# Altium PCB myjtag.PcbDoc
Units mm, origin at the board's own origin, x right, y up, seen from the top; angles counter-clockwise.
Board outline 46.25 x 32.25 mm, 2 copper layers (Top Layer, Bottom Layer), stack 1.3 mm thick; 35 components, 36 nets, 200 pads, 49 vias.
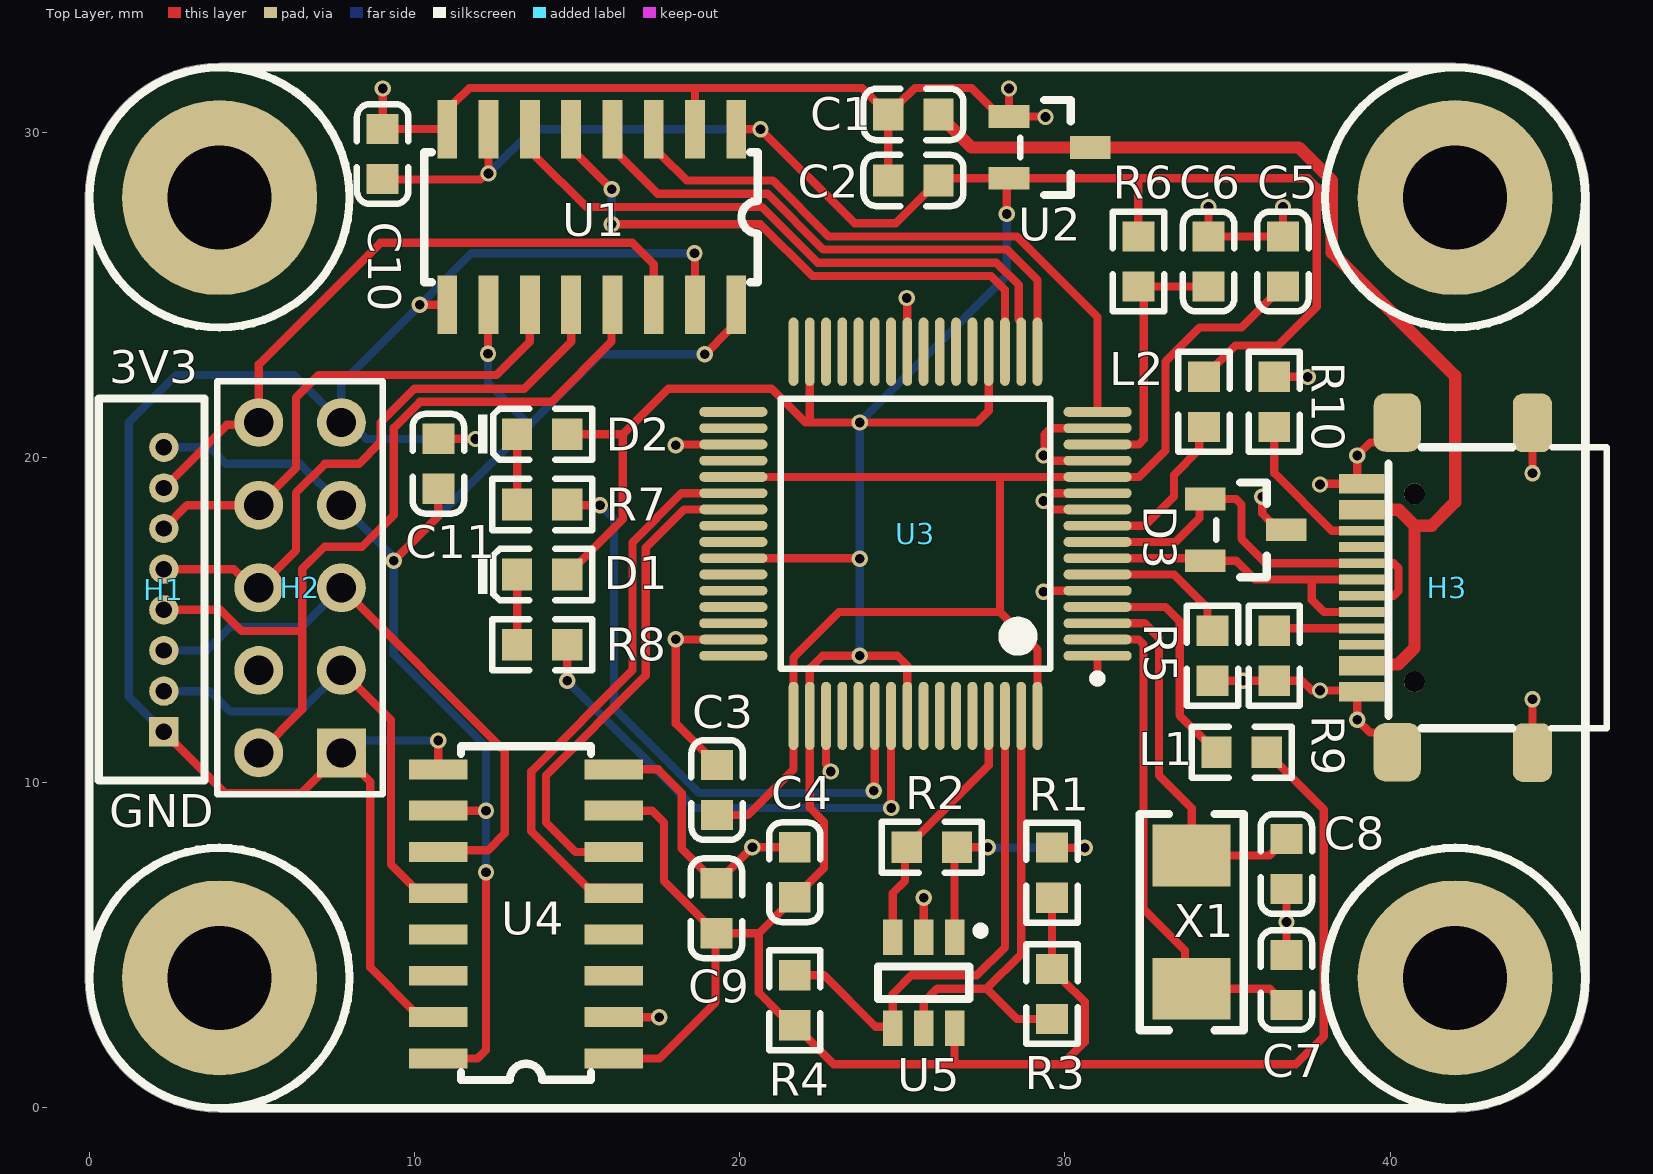
[diagram p0: Top Layer view]
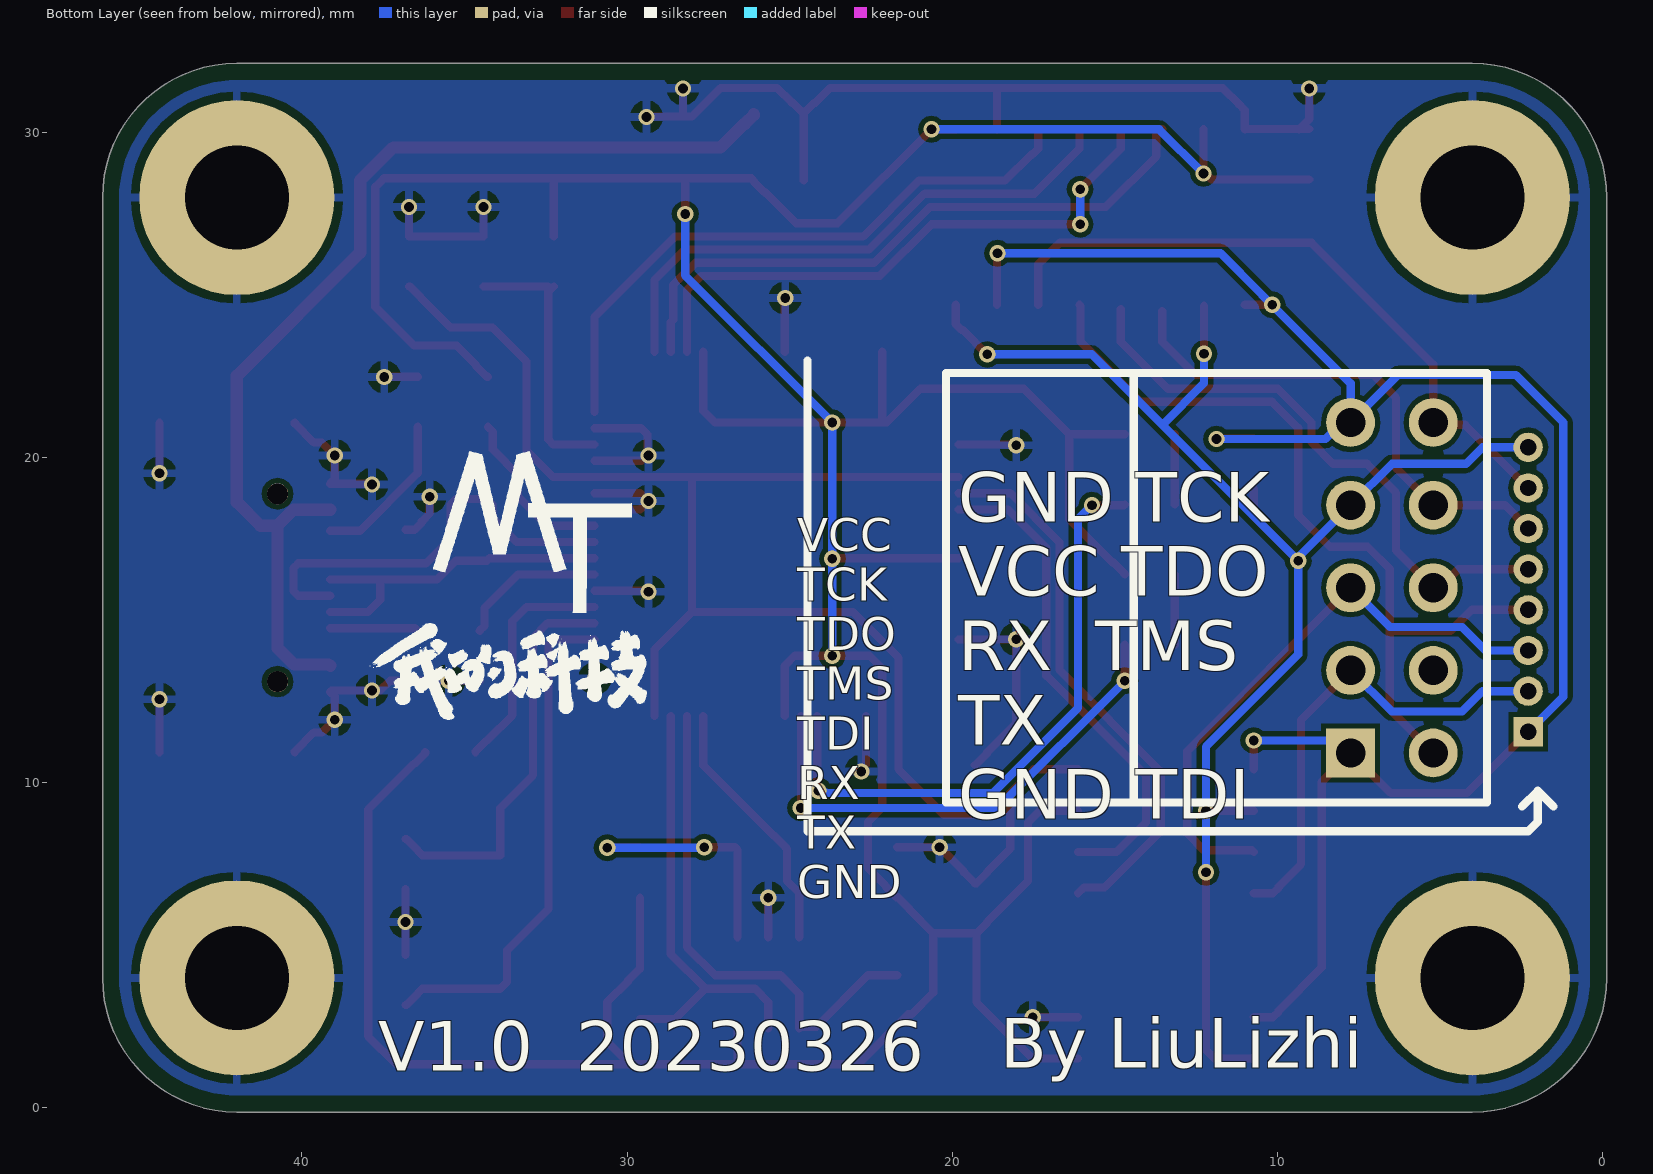
[diagram p1: Bottom Layer view, seen from below]
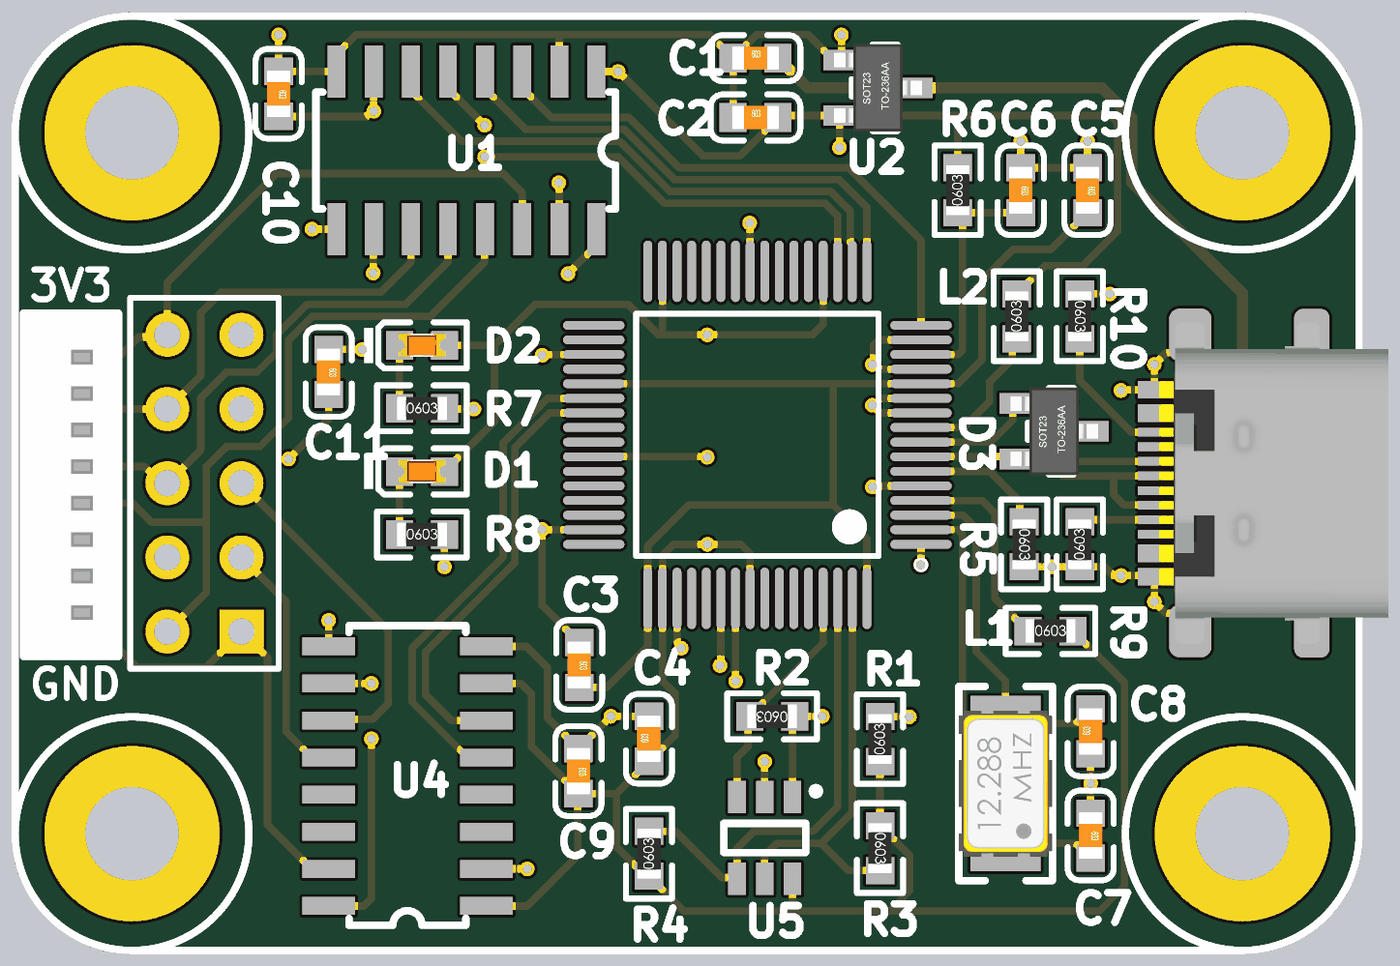
[diagram p2: 3D render of the assembled board from above, using the file's embedded part models]

## Layer stack, top to bottom
Top Solder: solder mask 0.15, Solder Resist, Dk 3.5
Top Layer: signal copper 0.35
Dielectric 1: dielectric 0.6, FR-4, Dk 4.8
Bottom Layer: signal copper 0.35
Bottom Solder: solder mask 0.15, Solder Resist, Dk 3.5

## Board outline
4,-0.127 cw(c4,4) -0.127,4 cw(c4,4) -0.127,4.005 -0.127,28 cw(c4,28) 4,32.127 cw(c4.002,31.096) 4.005,32.127 42,32.127 cw(c42,28) 46.127,28 cw(c42,28) 46.127,27.995 46.127,4 ccw(c45.312,4.002) 46.127,4.005 46.127,4 cw(c42,4) 42,-0.127 cw(c42,4) 41.995,-0.127

## Design rules (kind name [scope] priority, off if disabled: settings)
BoardOutlineClearance [All] p1: gap=0.508 ignorepadtopadclearanceinfootprint=FALSE
Clearance Clearance_1 [inpolygon vs OnLayer('Keep-Out Layer')] p1: gap=1.27 ignorepadtopadclearanceinfootprint=FALSE
Clearance [All] p2: gap=0.152 ignorepadtopadclearanceinfootprint=FALSE
DiffPairsRouting DiffPair_DiffPairsRouting [All] p1: maxlimit=0.254 minlimit=0.254 mostfreqgap=0.254 toplayer_minwidth=0.152 toplayer_maxwidth=0.381 toplayer_prefwidth=0.254 bottomlayer_minwidth=0.152 bottomlayer_maxwidth=0.381 bottomlayer_prefwidth=0.254 maxuncoupledlength=12.7
DiffPairsRouting DiffPairsRouting_1 [InDifferentialPair ('D')] p2: maxlimit=0.254 minlimit=0.254 mostfreqgap=0.254 toplayer_minwidth=0.381 toplayer_maxwidth=0.381 toplayer_prefwidth=0.381 bottomlayer_minwidth=0.381 bottomlayer_maxwidth=0.381 bottomlayer_prefwidth=0.381 maxuncoupledlength=12.7
DiffPairsRouting D_DiffPairsRouting [InDifferentialPair ('D')] p3: maxlimit=0.254 minlimit=0.254 mostfreqgap=0.254 toplayer_minwidth=0.381 toplayer_maxwidth=0.381 toplayer_prefwidth=0.381 bottomlayer_minwidth=0.381 bottomlayer_maxwidth=0.381 bottomlayer_prefwidth=0.381 maxuncoupledlength=12.7
DiffPairsRouting [All] p4: maxlimit=0.254 minlimit=0.152 mostfreqgap=0.254 toplayer_minwidth=0.152 toplayer_maxwidth=0.381 toplayer_prefwidth=0.254 bottomlayer_minwidth=0.152 bottomlayer_maxwidth=0.381 bottomlayer_prefwidth=0.254 maxuncoupledlength=12.7
HoleSize [All] p1: absolutevalues=TRUE maxlimit=3.81 minlimit=0.025 maxpercent=80.000 minpercent=20.000
MatchedLengths DiffPair_MatchedLengths [InDifferentialPair ('USB')] p1: tolerance=25.4 checknetsindiffpair=FALSE checkdiffpairvsdiffpair=TRUE checkxsignals=TRUE checkothers=TRUE
MatchedLengths [InDifferentialPair ('D')] p2: tolerance=25.4 checknetsindiffpair=FALSE checkdiffpairvsdiffpair=TRUE checkxsignals=TRUE checkothers=TRUE
MatchedLengths D_MatchedLengths [InDifferentialPair ('D')] p3: tolerance=25.4 checknetsindiffpair=FALSE checkdiffpairvsdiffpair=TRUE checkxsignals=TRUE checkothers=TRUE
PolygonConnect [All] p1: connectstyle=Relief reliefconductorwidth=0.254 reliefentries=4 polygonreliefangle="90 Angle" airgapwidth=0.254
RoutingVias [All] p1: holewidth=0.3 width=0.5 viastyle="Through Hole" minholewidth=0.3 minwidth=0.45 maxholewidth=3.81 maxwidth=4.318
SilkToSilkClearance [All] p1 off: silktosilkclearance=0.254
SilkToSolderMaskClearance [IsPad] p1 off: minsilkscreentomaskgap=0.254 clearancetoexposedcopper=TRUE
SolderMaskExpansion [All] p1: expansion=0.102 istentingtop=FALSE
UnRoutedNet [All] p1: checkbadconnections=TRUE
Width [All] p1: maxlimit=0.508 minlimit=0.152 preferedwidth=0.152
25 further rules are at their usual default settings.

## Components (designator, comment, footprint, x,y, rotation, side; value= is the part's Value field where it differs from the comment)
C1 "10UF" 0603_C 25.339,30.556 r0 top
C2 "10UF" 0603_C 25.339,28.524 r0 top
C3 "104" 0603_C 19.304,9.779 r270 top
C4 "104" 0603_C 21.691,7.25 r90 top
C5 "10UF" 0603_C 36.703,26.035 r270 top
C6 "10NF" 0603_C 34.417,26.035 r270 top
C7 "22PF" 0603_C 36.81,3.937 r270 top
C8 "22PF" 0603_C 36.81,7.501 r90 top
C9 "104" 0603_C 19.279,6.142 r270 top
C10 "104" 0603_C 9.017,29.337 r270 top
C11 "104" 0603_C 10.729,19.812 r270 top
D1 "0603_LED" 0603_LED 13.922,16.404 r0 top
D2 "0603_LED" 0603_LED 13.922,20.722 r0 top
D3 "ESD5302" SOT23 35.56,17.78 r0 top
H1 "SH1.25mm_8P" SH1.25MM_8P 2.286,20.32 r270 top locked
H2 "Header_2.54_5P_2" HDR2_5P 7.747,10.92 r180 top locked
H3 "USB_C" USB_C_16PIN_SMT 39.7,16 r90 top locked
L1 "600R1A" 0603_R 35.433,10.94 r0 top
L2 "600R1A" 0603_R 34.279,21.717 r90 top
R1 "10K" 0603_R 29.599,7.239 r90 top
R2 "2K" 0603_R 25.908,8.02 r180 top
R3 "10K" 0603_R 29.599,3.505 r270 top
R4 "10K" 0603_R 21.691,3.313 r90 top
R5 "12K" 0603_R 34.533,13.908 r270 top
R6 "10K" 0603_R 32.258,26.035 r90 top
R7 "2K" 0603_R 13.922,18.563 r0 top
R8 "2K" 0603_R 13.922,14.245 r0 top
R9 "5K1" 0603_R 36.438,13.908 r90 top
R10 "5K1" 0603_R 36.438,21.717 r270 top
U1 "CA-IS3741" SOIC16N 19.893,30.099 r270 top
U2 "3.3V" SOT23 29.53,29.54 r0 top
U3 "FT2232H" LQFP64 25.403,17.658 r180 top
U4 "CA-IS3741" SOIC16N 16.129,1.524 r180 top
U5 "93LC56BT" SOT_23_6 25.654,3.854 r270 top
X1 "12MHz" XTAL_5032 33.898,5.718 r90 top

## Footprints (in the part's own frame and the unit in brackets; to place one, negate y for a bottom-side part, rotate by r counter-clockwise, add the part's x,y. Pads: shape width x height; smd on the part's side, far side on the other; paste and mask are expansions set on the pad)
0603_C [mm]
  rect 0.93x0.98 smd: 1(-0.77,0) 2(0.77,0)
  silkscreen extent -1.53,-0.79 1.54,0.79, body extent -0.8,-0.4 0.8,0.4, height 0.3
0603_LED [mm]
  rect 0.93x0.98 smd: A(0.77,0) K(-0.77,0)
  silkscreen extent -1.98,-0.79 1.54,0.79, body extent -0.8,-0.4 0.8,0.4, height 0.6
0603_R [mm]
  rect 0.93x0.98 smd: 1(-0.77,0) 2(0.77,0)
  silkscreen extent -1.53,-0.79 1.54,0.79, body extent -0.85,-0.4 0.85,0.4, height 0.56
HDR2_5P [mm]
  rect 1.5x1.5 hole 0.9: 1(0,0)
  round 1.5 hole 0.9: 2(0,-2.54) 3(0,-5.08) 4(0,-7.62) 5(0,-10.16) 6(2.54,-10.16) 7(2.54,-7.62) 8(2.54,-5.08) 9(2.54,-2.54) 10(2.54,0)
  silkscreen extent -1.27,-11.43 3.81,1.27
LQFP64 [mm]
  oval 2.1x0.3 smd: 1(-5.6,3.75) 2(-5.6,3.25) 3(-5.6,2.75) 4(-5.6,2.25) 5(-5.6,1.75) 6(-5.6,1.25) 7(-5.6,0.75) 8(-5.6,0.25) 9(-5.6,-0.25) 10(-5.6,-0.75) 11(-5.6,-1.25) 12(-5.6,-1.75) 13(-5.6,-2.25) 14(-5.6,-2.75) 15(-5.6,-3.25) 16(-5.6,-3.75) 33(5.6,-3.75) 34(5.6,-3.25) 35(5.6,-2.75) 36(5.6,-2.25) 37(5.6,-1.75) 38(5.6,-1.25) 39(5.6,-0.75) 40(5.6,-0.25) 41(5.6,0.25) 42(5.6,0.75) 43(5.6,1.25) 44(5.6,1.75) 45(5.6,2.25) 46(5.6,2.75) 47(5.6,3.25) 48(5.6,3.75)
  oval 0.3x2.1 smd: 17(-3.75,-5.6) 18(-3.25,-5.6) 19(-2.75,-5.6) 20(-2.25,-5.6) 21(-1.75,-5.6) 22(-1.25,-5.6) 23(-0.75,-5.6) 24(-0.25,-5.6) 25(0.25,-5.6) 26(0.75,-5.6) 27(1.25,-5.6) 28(1.75,-5.6) 29(2.25,-5.6) 30(2.75,-5.6) 31(3.25,-5.6) 32(3.75,-5.6) 49(3.75,5.6) 50(3.25,5.6) 51(2.75,5.6) 52(2.25,5.6) 53(1.75,5.6) 54(1.25,5.6) 55(0.75,5.6) 56(0.25,5.6) 57(-0.25,5.6) 58(-0.75,5.6) 59(-1.25,5.6) 60(-1.75,5.6) 61(-2.25,5.6) 62(-2.75,5.6) 63(-3.25,5.6) 64(-3.75,5.6)
  silkscreen extent -5.72,-4.15 4.15,4.57, body extent -5,-5 5,5, height 1.6
SH1.25MM_8P [mm]
  rect 0.9x0.9 hole 0.5: 1(8.75,0)
  round 0.9 hole 0.5: 2(7.5,0) 3(6.25,0) 4(5,0) 5(3.75,0) 6(2.5,0) 7(1.25,0) 8(0,0)
  silkscreen extent -1.5,-2 10.25,1.25, body extent -1.5,-1.95 10.25,1.25, height 4.7
SOIC16N [mm]
  rect 1.8x0.61 smd: 1(0,0) 2(0,-1.27) 3(0,-2.54) 4(0,-3.81) 5(0,-5.08) 6(0,-6.35) 7(0,-7.62) 8(0,-8.89) 9(5.4,-8.89) 10(5.4,-7.62) 11(5.4,-6.35) 12(5.4,-5.08) 13(5.4,-3.81) 14(5.4,-2.54) 15(5.4,-1.27) 16(5.4,0)
  silkscreen extent 0.7,-9.6 4.7,0.66, body extent 0.7,-9.6 4.7,0.65, height 1.75
SOT23 [mm]
  rect 1.25x0.7 smd: 1(-1.25,0.95) 2(-1.25,-0.95) 3(1.25,0)
  silkscreen extent -0.9,-1.46 0.65,1.46, body extent -1.5,-1.5 1.5,1.5, height 1.3
SOT_23_6 [mm]
  rect 1.1x0.6 smd: 1(-1.4,0.95) 2(-1.4,0) 3(-1.4,-0.95) 4(1.4,-0.95) 5(1.4,0) 6(1.4,0.95)
  silkscreen extent -1.72,-1.4 0.5,1.87, body extent -0.9,-1.45 0.9,1.45, height 1.1
USB_C_16PIN_SMT [mm]
  rrect50% 1.8x1.2 smd: 0(-5.07,-4.677) 0(5.07,-4.677)
  rrect50% 1.8x1.45 smd: 0(-5.06,-0.519) 0(5.08,-0.519)
  rect 0.6x1.4 smd: 1(-3.2,0.57) 2(-2.4,0.57) 11(2.4,0.57) 12(3.2,0.57)
  rect 0.3x1.4 smd: 3(-1.75,0.57) 4(-1.25,0.57) 5(-0.75,0.57) 6(-0.25,0.57) 7(0.25,0.57) 8(0.75,0.57) 9(1.25,0.57) 10(1.75,0.57)
  round 0.65 hole 0.65: 13(-2.888,-1.049) 13(2.888,-1.049)
  silkscreen extent -4.32,-6.96 4.32,-0.25, body extent -5.5,-7.3 5.5,0.55, height 3.2
XTAL_5032 [mm]
  rect 1.9x2.4 smd: 1(-2.05,0) 2(2.05,0)
  silkscreen extent -3.32,-1.6 3.32,1.6, body extent -2.5,-1.6 2.5,1.6, height 1.2

## Part data
C1 C2 C3 C4 C5 C6 C7 C8 C9 C10 C11: library part 0603_CAP
D3: library part PESD5V2S2UT, "ESD DIODE"
H3: library part USB_C_16P_SMT
L1 L2: library part 0603_BeadCore, "Bead core"
R1 R2 R3 R4 R5 R6 R7 R8 R9 R10: library part 0603_RES
U2: library part LDO_XC6206P332MR, "线性稳压器"
X1: library part XTAL_5032, "贴片无源晶振"

## Free pads (board coordinates)
  round 6 hole 3.2: 1(4,4) 1(4,28) 1(42,4) 1(42,28)

## Via types
v1: diameter 0.5, hole 0.3, Top Layer to Bottom Layer, 49 vias

## Nets (pads, with @x,y where several pads share a name; then routed paths per layer and width w, separated by ;. In a path a pad name is that pad's centre, name@x,y a point inside that pad or via, vN(x,y) a via of type N, cw(c..) or ccw(c..) an arc to the next point about the centre after c; other vN are vias at no path point)
1V8: C3.2 C5.2 U3.12 U3.37 U3.49 U3.64 | length 42.1
  Top Layer w0.254: C3.2 20.248,9.009 21.653,10.414 U3.49 21.653,13.849 23.054,15.25 28.005,15.25 ; U3.37 28.005,19.408 ; U3.64 29.153,14.102 28.005,15.25 ; C5.2 36.678,25.265 36.34,24.927 36.34,24.91 35.433,24.003 34.138,24.003 33.091,22.957 33.091,20.217 32.282,19.408 U3.12 28.005,19.408 ; 28.005,15.25 28.005,19.408
3V3: C2.2 C4.1 C9.2 C10.2 D1.A D2.A L1.2 L2.2 R1.1 R3.1 R4.1 R6.2 U1.1 U1.7 U2.2 U3.20 U3.31 U3.42 U3.50 U3.56 U4.1 U4.7 U5.6 | length 150.8
  Top Layer w0.254: C10.2@9.017,28.556 12.024,28.556 12.207,28.739 v1(12.273,28.739) U1.7 ; D1.A 14.692,16.429 15.03,16.767 15.055,16.767 16.401,18.113 16.401,20.698 16.377,20.722 D2.A ; U4.1 17.527,1.524 19.254,3.251 19.254,5.347 C9.2 ; U4.7 17.306,9.144 17.671,8.779 17.671,6.98 18.916,5.735 18.916,5.71 19.254,5.372 C9.2 ; 16.401,20.722 17.803,22.123 20.972,22.123 22.013,21.082 22.153,21.082 ; U3.42 23.669,16.908 v1(23.685,16.891) ; U1.1 20.644,30.099 23.531,27.211 24.797,27.211 25.746,28.161 25.771,28.161 26.109,28.499 C2.2 26.175,28.59 U2.2 ; U3.31 22.153,21.082 ; U3.56 25.153,13.6 24.845,13.908 v1(23.693,13.908) 22.54,13.908 22.153,13.521 U3.50 22.153,9.233 22.587,8.799 22.587,7.376 22.054,6.843 22.054,6.818 21.716,6.48 C4.1 21.666,6.48 21.328,6.142 21.328,6.117 20.583,5.372 ; U5.6 26.604,1.346 ; U3.20 27.653,21.442 27.292,21.082 v1(23.685,21.082) 22.153,21.082 ; v1(28.211,27.495) 28.211,28.521 U2.2 ; R1.1 R3.1 29.624,4.275 29.962,3.937 29.962,3.912 30.607,3.267 30.607,2.032 29.921,1.346 ; R6.2 32.258,28.581 32.249,28.59 ; L2.2 34.304,22.487 34.642,22.825 34.642,22.85 35.241,23.449 36.551,23.449 37.74,24.639 37.74,28.329 37.48,28.59 32.249,28.59 ; L1.2 36.203,10.915 36.541,10.577 36.566,10.577 37.963,9.18 37.963,2.205 37.104,1.346 29.921,1.346 ; C9.2 20.583,5.372 ; 20.583,5.372 20.583,3.547 21.249,2.881 21.353,2.881 R4.1 21.716,2.543 22.054,2.205 22.054,2.18 22.888,1.346 26.604,1.346 ; 26.604,1.346 29.921,1.346 ; U2.2 32.249,28.59
  Bottom Layer w0.254: v1(12.273,28.739) 13.634,30.099 v1(20.637,30.099) ; v1(23.693,13.908) 23.693,16.884 v1(23.685,16.891) v1(23.685,21.082) 28.211,25.608 v1(28.211,27.495)
5V: C1.2 H3.2 H3.11 U2.3 | length 33.4
  Top Layer w0.381: C1.2 26.109,30.531 26.384,30.256 26.409,30.256 27.125,29.54 U2.3 37.194,29.54 38.21,28.524 38.21,26.306 42,22.516 42,18.632 41.28,17.912 40.749,17.912 ; H3.2 39.169,13.639 40.244,13.639 40.749,14.144 40.749,17.912 ; H3.11 40.261,18.4 40.749,17.912
D_N: D3.2 H3.5 H3.7 U3.7 | length 10.7
  Top Layer w0.254: U3.7 34.232,16.908 D3.2 35.265,16.83 35.845,16.25 37.592,16.25 ; H3.5 37.963,15.25 37.592,15.621 37.592,16.25 ; H3.7 37.592,16.25
D_P: D3.1 H3.6 H3.8 U3.8 | length 13.4
  Top Layer w0.254: U3.8 33.398,17.408 34.138,18.148 34.138,18.558 D3.1 35.265,18.73 35.433,18.562 35.433,17.504 36.187,16.75 H3.8 40.112,16.75 40.261,16.601 40.261,15.899 40.112,15.75 H3.6
EECLK: R4.2 U3.62 U5.4 | length 15.9
  Top Layer w0.254: R4.2 22.587,4.083 24.172,2.498 24.66,2.498 U5.4 24.704,3.505 25.282,4.083 27.296,4.083 28.153,4.94 U3.62
EECS: R3.2 U3.63 U5.5 | length 14.1
  Top Layer w0.254: U5.5 25.654,3.251 26.071,3.668 27.594,3.668 ; U3.63 28.653,4.727 27.594,3.668 ; R3.2 28.527,2.735 27.594,3.668
EEDAT: R2.2 U3.61 U5.3 | length 8
  Top Layer w0.254: U5.3 24.704,6.605 25.084,6.985 25.084,7.965 R2.2 ; R2.2@25.138,8.045 25.476,8.383 25.501,8.383 27.653,10.535 U3.61
GND: C1.1 C2.1 C3.1 C4.2 C5.1 C6.1 C7.1 C8.1 C9.1 C10.1 D3.3 H3.0 H3.1 H3.12 pad.1 R5.2 R9.1 R10.1 U1.2 U1.8 U2.1 U3.1 U3.5 U3.10 U3.11 U3.13 U3.15 U3.25 U3.35 U3.47 U3.51 U4.2 U4.8 U5.2 | length 84.4
  Top Layer w0.254: C10.1 U1.8@10.995,30.107 ; v1(9.017,31.351) 9.017,30.414 C10.1@9.335,30.096 ; U1.8 11.003,30.694 11.181,30.872 11.185,30.872 11.682,31.369 18.605,31.369 18.623,31.351 U1.2 ; U4.2 v1(17.526,2.794) ; U4.8 17.488,10.414 18.213,9.689 18.213,7.977 18.916,7.275 18.916,7.25 19.254,6.912 C9.1 19.304,6.912 19.642,7.25 19.642,7.275 v1(20.387,8.02) C4.2 ; 17.653,31.369 23.756,31.369 24.206,30.919 24.231,30.919 C1.1@24.569,30.581 ; v1(18.034,20.383) 18.058,20.408 U3.35 ; C3.1 19.279,10.549 18.941,10.887 18.941,10.912 18.034,11.819 v1(18.034,14.414) 18.041,14.408 U3.47 ; U3.51 22.653,10.561 22.796,10.417 v1(22.796,10.351) ; C2.1 C1.1 C1.1@24.569,30.581 ; v1(25.138,24.91) 25.153,24.895 U3.25 ; U5.2 v1(25.654,6.469) ; v1(28.28,31.351) U2.1 ; v1(29.337,15.875) 29.37,15.908 U3.5 ; v1(29.337,18.669) v1@29.338,18.669 ; v1(29.4,30.48) 29.391,30.49 U2.1 ; v1(30.988,13.208) 31.003,13.223 U3.1 ; U3.10 29.599,18.408 v1@29.338,18.669 ; U3.11 29.599,18.908 29.36,18.669 v1@29.338,18.669 ; U3.13 29.562,19.908 29.404,20.066 v1(29.337,20.066) 29.37,20.099 29.37,20.709 29.569,20.908 U3.15 ; v1(34.417,27.711) C6.1 C5.1 v1(36.703,27.711) ; R5.2 v1(35.485,13.138) R9.1 37.292,13.138 37.592,12.838 v1(37.846,12.838) 39.092,12.838 H3.1 38.989,12.659 v1(38.989,11.938) 39.381,11.546 39.639,11.546 40.219,10.966 H3.0@40.219,10.94 ; v1(36.068,18.796) 36.068,18.288 36.312,18.044 36.312,18.003 36.535,17.78 D3.3 ; R10.1 37.457,22.487 v1(37.465,22.479) ; C7.1 v1(36.81,5.719) C8.1 ; v1(37.846,19.177) 37.869,19.2 H3.12 38.989,19.341 v1(38.989,20.066) 39.389,20.466 39.639,20.466 40.219,21.046 H3.0@40.219,21.08 ; H3.0@44.377,10.93 v1(44.377,12.573) ; v1(44.377,19.522) H3.0@44.377,21.07 ; C1.1@24.569,30.581 24.907,30.919 24.932,30.919 25.382,31.369 27.126,31.369 28.005,30.49 U2.1
GND_O: C11.1 H1.1 H2.1 H2.5 U1.9 U1.15 U4.9 U4.15 | length 60.3
  Top Layer w0.254: H1.1 4.167,9.689 6.516,9.689 H2.1 8.636,10.031 8.636,4.317 9.956,2.997 9.956,2.972 10.134,2.794 U4.15 ; v1(10.16,24.701) 10.162,24.699 U1.9 ; U4.9 v1(10.729,11.303) ; C11.1 11.866,20.582 v1(11.874,20.574) ; v1(18.605,26.289) 18.623,26.271 U1.15
  Bottom Layer w0.254: H1.1 1.206,12.649 1.206,21.082 2.667,22.543 6.285,22.543 H2.5 ; H2.1 8.13,11.303 v1(10.729,11.303) ; v1(10.16,24.701) 10.48,25.022 11.747,26.289 v1(18.605,26.289) ; 10.481,25.02 7.747,22.286 H2.5 ; v1(11.874,20.574) 8.519,20.574 8.013,21.08 H2.5
NetC6_2: C6.2 R6.1 U3.14 | length 8.3
  Top Layer w0.254: U3.14 32.271,20.408 32.42,20.557 32.42,25.103 R6.1 ; R6.1@32.42,25.265 C6.2
NetC7_2: C7.2 U3.2 X1.1 | length 15.8
  Top Layer w0.254: U3.2 32.27,14.408 32.418,14.259 32.418,6.126 33.694,4.85 33.694,3.872 X1.1 36.298,3.668 36.447,3.519 36.447,3.505 36.785,3.167 C7.2
NetC8_2: C8.2 U3.3 X1.2 | length 12.3
  Top Layer w0.254: U3.3 32.44,14.908 32.893,14.455 32.893,10.231 33.898,9.226 X1.2 36.298,7.768 36.447,7.917 36.447,7.933 36.785,8.271 C8.2
NetD1_K: D1.K R8.1 | length 2.2
  Top Layer w0.254: R8.1 D1.K
NetD2_K: D2.K R7.1 | length 2.2
  Top Layer w0.254: R7.1 D2.K
NetH3_4: H3.4 R9.2 | length 2.7
  Top Layer w0.254: R9.2 36.51,14.75 H3.4
NetH3_10: H3.10 R10.2 | length 4.9
  Top Layer w0.254: R10.2 36.438,19.522 38.21,17.75 H3.10
NetL1_1: L1.1 U3.4 | length 7.2
  Top Layer w0.254: U3.4 33.091,15.408 33.528,14.971 33.528,12.075 34.3,11.303 34.325,11.303 34.663,10.965 L1.1
NetL2_1: L2.1 U3.9 | length 5.2
  Top Layer w0.254: U3.9 32.459,17.908 33.351,18.799 33.351,19.472 34.129,20.25 34.129,20.797 L2.1
NetR1_2: R1.2 R2.1 U5.1 | length 7.7
  Top Layer w0.254: U5.1 26.604,7.946 R2.1 v1(27.623,8.02) ; R1.2 29.607,8.001 v1(30.607,8.001)
  Bottom Layer w0.254: v1(27.623,8.02) 27.642,8.001 v1(30.607,8.001)
NetR5_1: R5.1 U3.6 | length 4.6
  Top Layer w0.254: U3.6 33.351,16.408 34.383,15.375 34.383,14.827 R5.1
NetR7_2: R7.2 U3.54 | length 18.8
  Top Layer w0.254: R7.2 14.715,18.54 v1(15.701,18.54) ; v1(24.123,9.756) 24.153,9.785 U3.54
  Bottom Layer w0.254: v1(15.701,18.54) 16.129,18.112 16.129,12.308 18.748,9.689 23.883,9.689 23.902,9.709 24.076,9.709 v1(24.123,9.756)
NetR8_2: R8.2 U3.55 | length 15.5
  Top Layer w0.254: v1(14.692,13.138) R8.2 ; U3.55 24.653,9.233 v1(24.66,9.226)
  Bottom Layer w0.254: v1(14.692,13.138) 18.604,9.226 v1(24.66,9.226)
RX: U3.39 U4.6 | length 15.4
  Top Layer w0.254: U4.6 14.944,7.874 14.039,8.779 14.039,10.229 17.107,13.297 17.107,17.227 18.288,18.408 U3.39
RX_O: H1.3 H2.3 U4.11 | length 18.2
  Top Layer w0.254: H2.3 12.769,10.978 12.769,8.439 12.254,7.924 10.779,7.924 U4.11
  Bottom Layer w0.254: H1.3 3.592,14.07 4.317,14.795 6.542,14.795 H2.3
TCK: U1.3 U3.16 | length 19.3
  Top Layer w0.254: U1.3 17.353,29.504 17.531,29.326 17.567,29.326 18.369,28.524 21.016,28.524 22.735,26.805 28.524,26.805 31.003,24.326 U3.16
TCK_O: H1.7 H2.6 U1.14 | length 20.8
  Top Layer w0.254: H1.7 4.225,21.009 5.136,21.009 H2.6 5.207,22.87 8.944,26.607 16.696,26.607 17.353,25.949 U1.14
TDI: U1.4 U3.17 | length 17.5
  Top Layer w0.254: U1.4 16.083,29.504 17.47,28.117 20.847,28.117 22.566,26.399 28.211,26.399 29.153,25.457 U3.17
TDI_O: H1.4 H2.10 U1.13 | length 25.9
  Top Layer w0.254: H1.4 4.023,15.32 4.675,14.668 6.54,14.668 ; H2.10 6.54,12.254 6.54,14.668 ; U1.13 16.058,24.673 16.058,23.567 14.208,21.717 10.16,21.717 9.36,20.917 9.36,18.238 8.382,17.26 7.227,17.26 6.54,16.573 6.54,14.668
TDO: U1.6 U3.18 | length 19.5
  Top Layer w0.254: U1.6 13.721,29.921 13.721,29.268 15.278,27.711 20.679,27.711 22.398,25.992 27.898,25.992 28.582,25.308 28.582,24.241 28.653,24.17 U3.18
TDO_O: H1.6 H2.7 U1.11 | length 15.8
  Top Layer w0.254: H1.6 3.006,18.54 H2.7 6.35,19.683 6.35,21.844 7.048,22.543 12.517,22.543 13.541,23.567 13.541,24.508 U1.11@13.543,24.51
TMS: U1.5 U3.19 | length 18.3
  Top Layer w0.254: U1.5 14.813,29.504 16.06,28.258 v1(16.066,28.258) ; v1(16.066,27.178) 20.638,27.178 22.23,25.586 27.729,25.586 28.153,25.162 U3.19
  Bottom Layer w0.254: v1(16.066,27.178) v1(16.066,28.258)
TMS_O: H1.5 H2.8 U1.12 | length 18.3
  Top Layer w0.254: H1.5 4.435,16.57 5.005,16 H2.8 6.35,17.143 6.35,18.923 7.239,19.812 8.286,19.812 8.954,20.479 8.954,21.085 9.992,22.123 13.375,22.123 14.813,23.562 U1.12@14.813,24.564
TX: U3.38 U4.5 | length 17.2
  Top Layer w0.254: U4.5 15.951,6.782 15.316,6.782 13.589,8.509 13.589,10.354 16.7,13.465 16.7,17.395 18.213,18.908 U3.38
TX_O: H1.2 H2.2 U4.12 | length 14.7
  Top Layer w0.254: H2.2 9.271,11.936 9.271,7.493 9.956,6.808 9.956,6.782 10.134,6.604 U4.12
  Bottom Layer w0.254: H1.2 3.689,12.82 4.317,12.192 6.479,12.192 H2.2
VCC: C11.2 H1.8 H2.4 U1.10 U1.16 U4.10 U4.16 | length 48.9
  Top Layer w0.254: v1(9.36,16.83) 10.729,18.199 C11.2 ; U4.16 11.938,1.524 12.192,1.778 v1(12.192,7.25) ; U4.10 v1(12.192,9.144) ; v1(12.254,23.195) U1.10@12.254,24.67 ; v1(18.923,23.177) 19.671,23.926 19.716,23.926 19.893,24.104 U1.16
  Bottom Layer w0.254: H1.8 3.689,20.32 4.197,19.812 6.475,19.812 H2.4 9.313,16.974 9.313,16.877 v1(9.36,16.83) ; v1(12.192,7.25) 12.192,11.112 9.36,13.945 v1(9.36,16.83) ; v1(12.254,23.195) 12.254,22.29 13.537,21.007 ; v1(18.923,23.177) 15.707,23.177 13.537,21.007 ; v1(9.36,16.83) 13.537,21.007
pads on no net: H2.9 H3.3 H3.9 H3.13 U3.21 U3.22 U3.23 U3.24 U3.26 U3.27 U3.28 U3.29 U3.30 U3.32 U3.33 U3.34 U3.36 U3.40 U3.41 U3.43 U3.44 U3.45 U3.46 U3.48 U3.52 U3.53 U3.57 U3.58 U3.59 U3.60 U4.3 U4.4 U4.13 U4.14

## Polygon pours and split planes (outlines as drawn)
GND on Bottom Layer "GND_L02_P000" (solid, remove dead copper, pour order 0): 4,-0.127 cw(c4,4) -0.127,4 cw(c4,4) -0.127,4.005 -0.127,28 cw(c4,28) 4,32.127 cw(c4.002,31.096) 4.005,32.127 42,32.127 cw(c42,28) 46.127,28 cw(c42,28) 46.127,27.995 46.127,4 ccw(c45.312,4.002) 46.127,4.005 46.127,4 cw(c42,4) 42,-0.127 cw(c42,4) 41.995,-0.127

## Silkscreen, mask and mechanical layers (free items; w line width, h text height)
Top Overlay:
  circle w0.254: c4,28 r4
  circle w0.254: c42,28 r4
  circle w0.254: c42,4 r4
  circle w0.254: c4,4 r4
  lines w0.254: 0,4 0,28 ; 4,0 42,0 ; 4,32 42,32 ; 46,4 46,28
  text "3V3" at 0.614,22.289 h1.02
  text "GND" at 0.614,8.636 h1.02
Bottom Overlay:
  drawing of 3055 lines, arcs and shapes, not listed
  text "GND TCK / VCC TDO / RX  TMS / TX / GND TDI" at 19.812,8.892 h1.52
  text "VCC / TCK / TDO / TMS / TDI / RX / TX / GND" at 24.764,6.452 h1.02
  text "By LiuLizhi" at 18.517,1.234 h1.52
  text "V1.0  20230326" at 37.655,1.143 h1.52
Mechanical 1:
  lines w0.254: 0,4 ccw(c4,4) 4,0 42,0 ccw(c42,4) 46,4 46,28 ccw(c42,28) 42,32 4,32 ccw(c4,28) 0,28 0,4